# Altium PCB PCB.PcbDoc (part 1 of 2)
Units mil, origin at the board's own origin, x right, y up, seen from the top; angles counter-clockwise.
Board outline 1968.5 x 1220.47 mil, 2 copper layers (Top Layer, Bottom Layer); 78 components, 60 nets, 294 pads, 70 vias.
Unrouted connection lines stored in the file: 2.
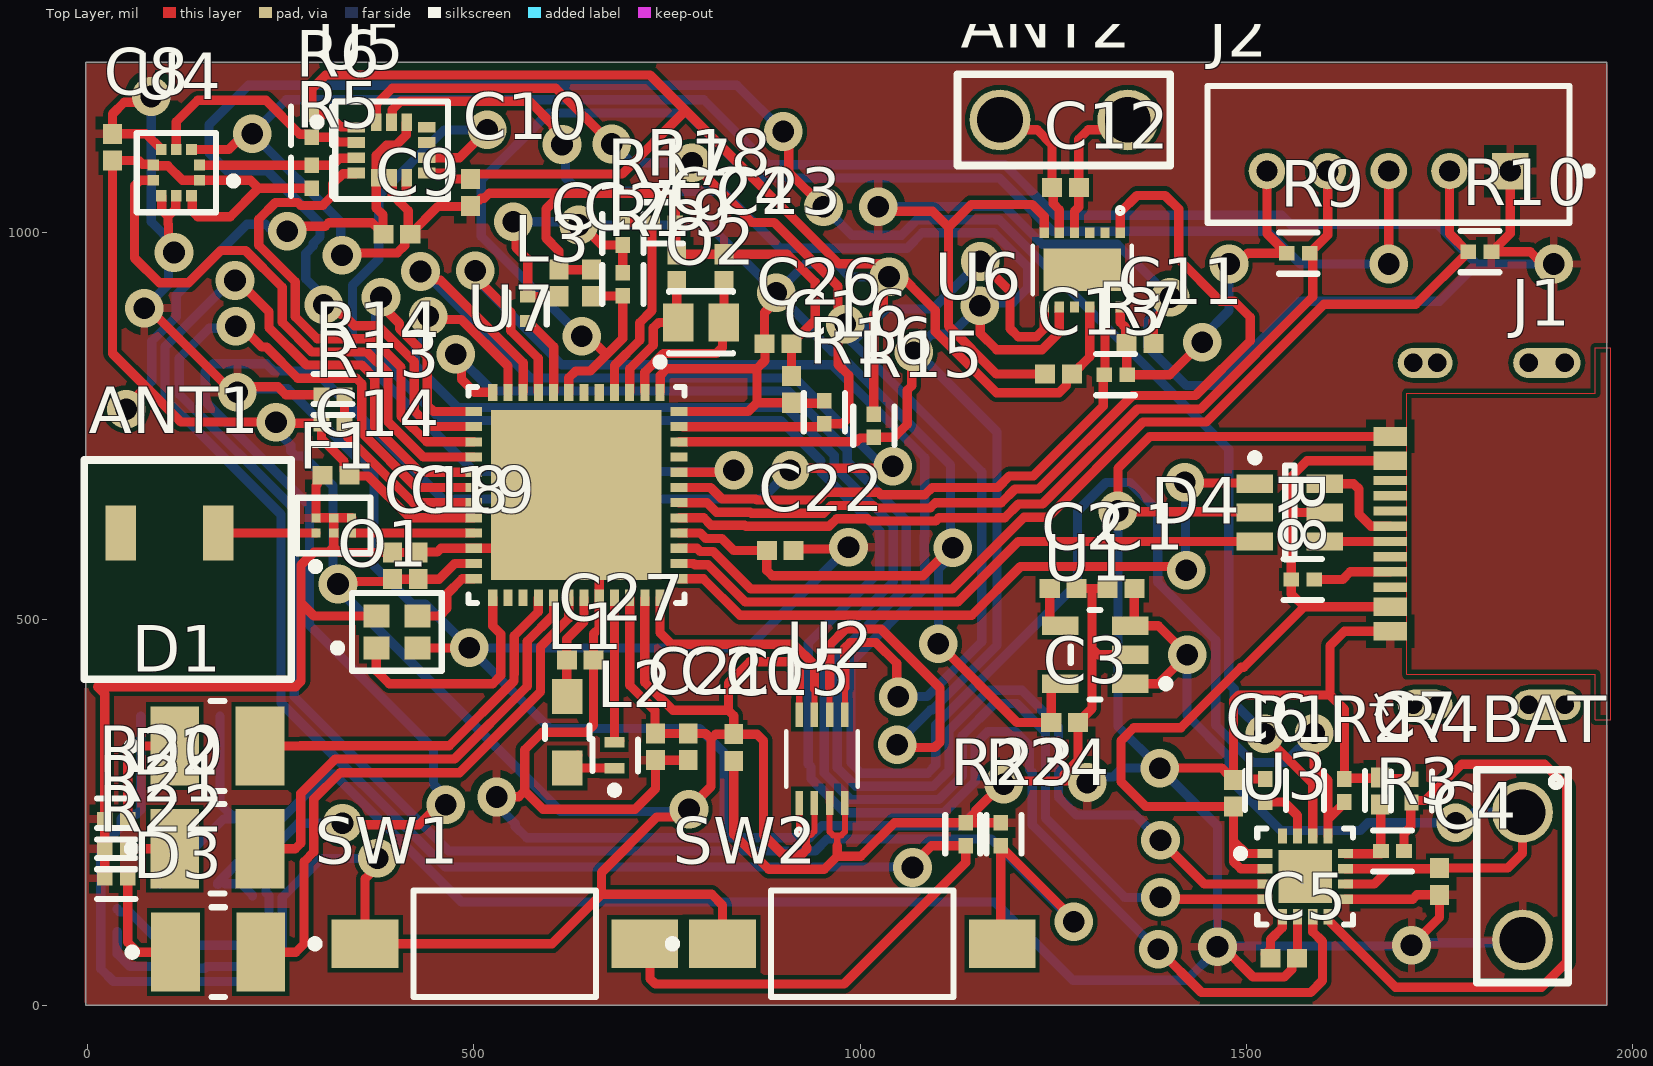
[diagram p0: Top Layer view]
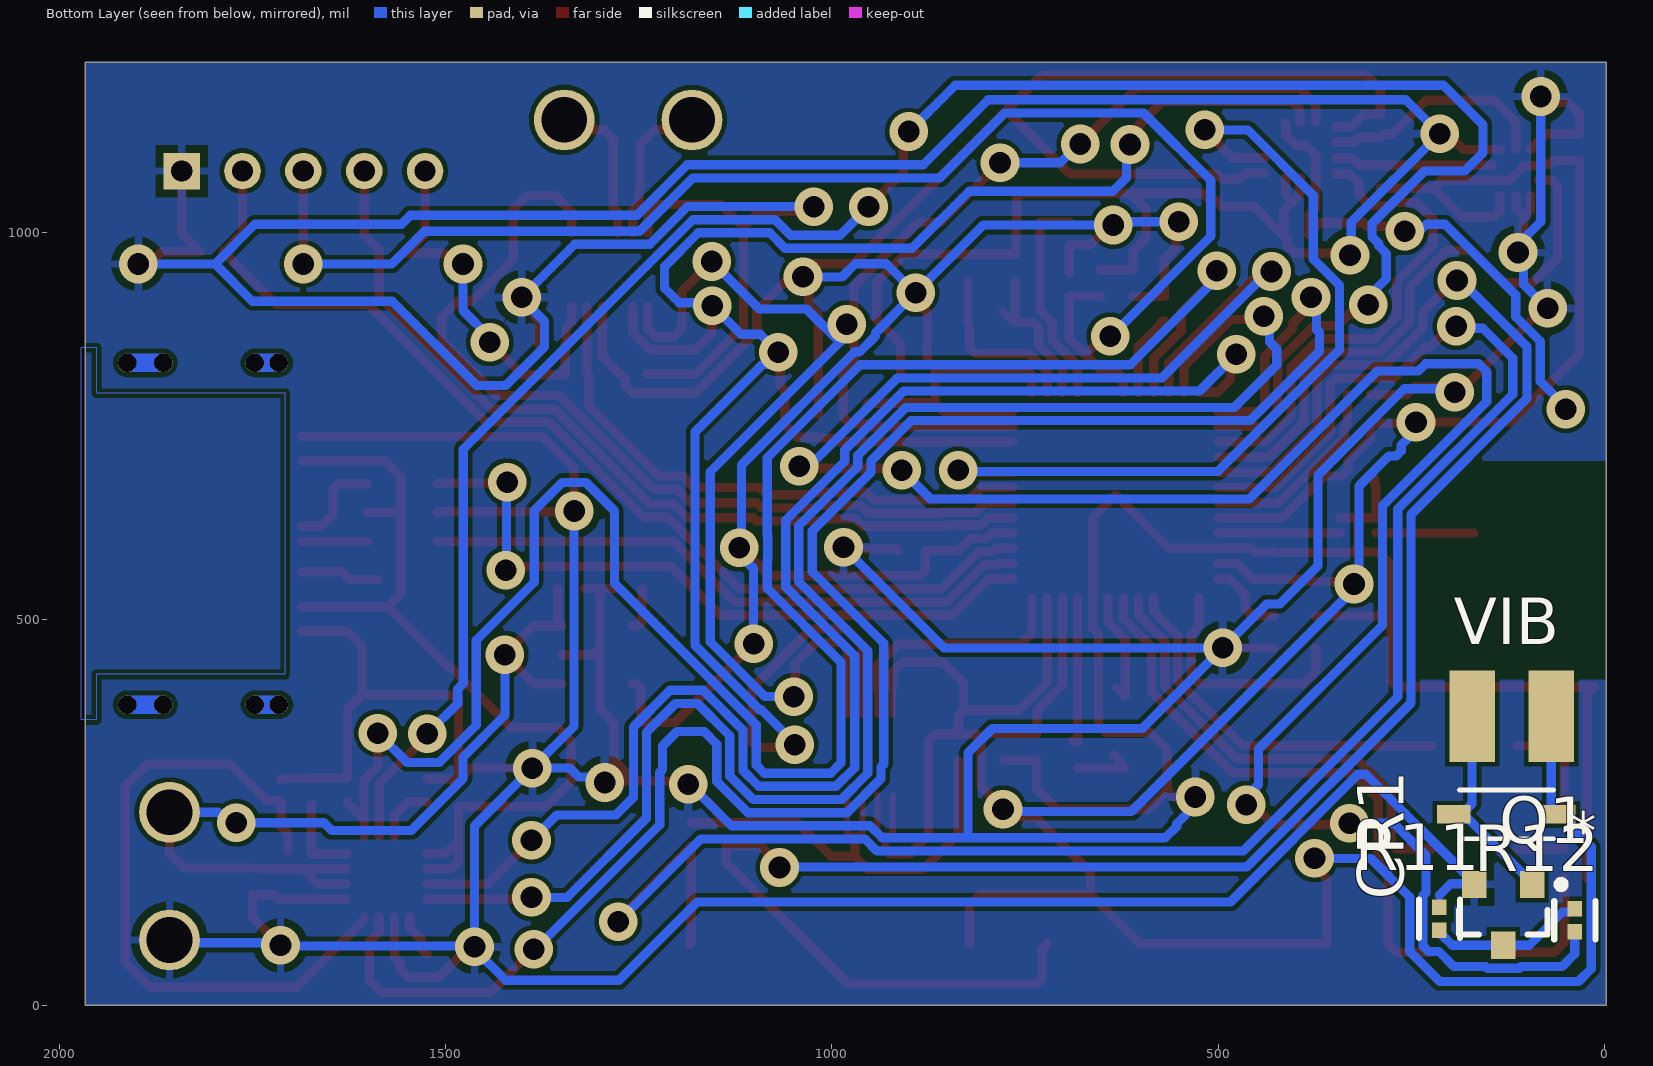
[diagram p1: Bottom Layer view, seen from below]
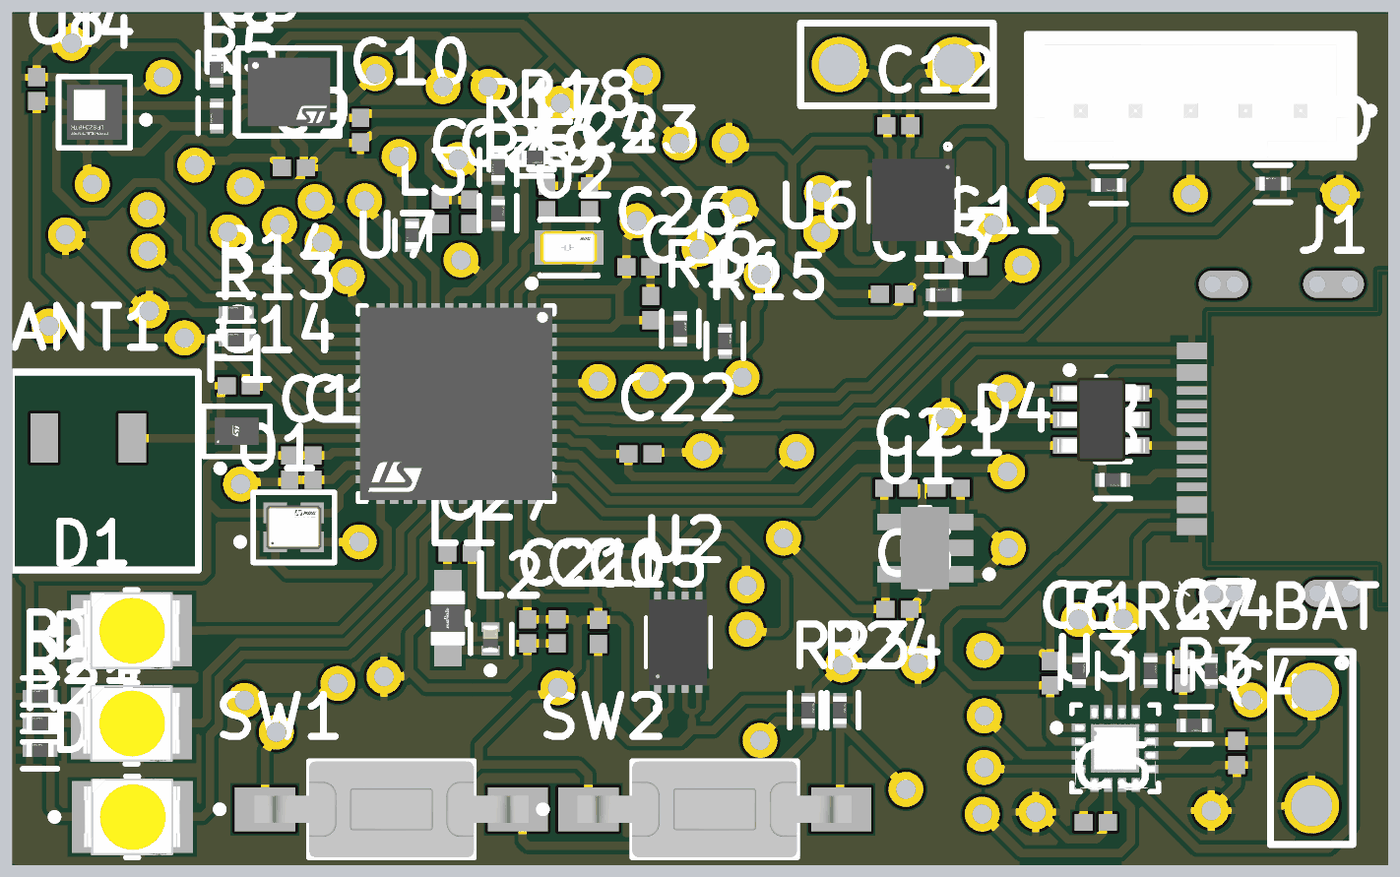
[diagram p3: 3D render of the assembled board from above, using the file's embedded part models]
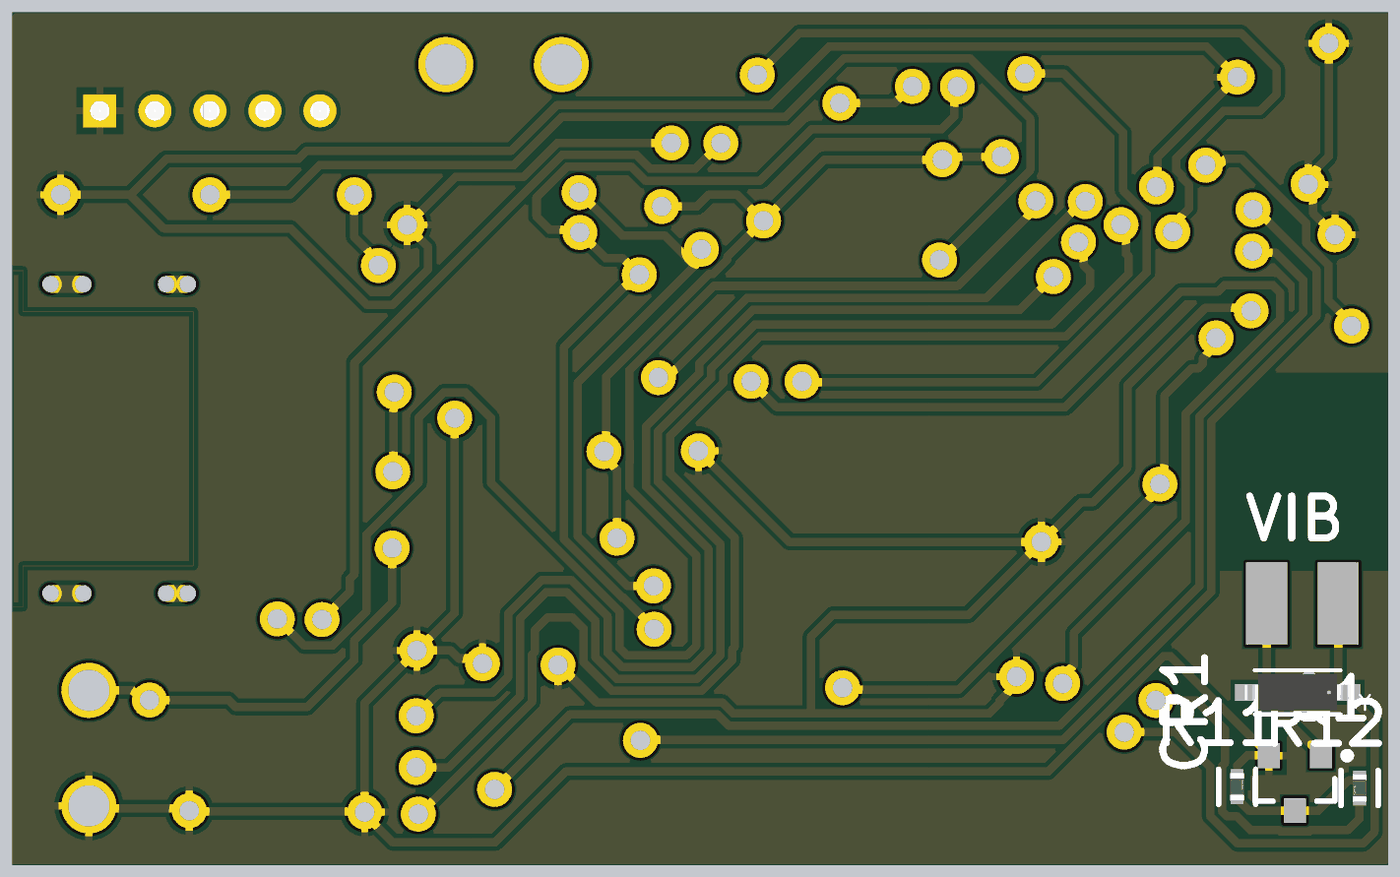
[diagram p4: 3D render of the assembled board from below, using the file's embedded part models]

## Layer stack, top to bottom
Top Solder: solder mask 0.4, Solder Resist, Dk 3.5
Top Layer: signal copper 1.4
Dielectric 1: dielectric 12.6, FR-4, Dk 4.8
Bottom Layer: signal copper 1.4
Bottom Solder: solder mask 0.4, Solder Resist, Dk 3.5

## Board outline
-1.97,0 -1.97,1220.47 1966.54,1220.47 1966.54,0

## Design rules (kind name [scope] priority, off if disabled: settings)
Clearance [All] p1: gap=6 ignorepadtopadclearanceinfootprint=FALSE except(0: Arc-Hole Track-Hole SMDPad-Hole THPad-Hole Via-Hole Fill-Hole Poly-Hole Region-Hole Text-Hole; 5: Arc-Arc Arc-Track Track-Track)
PolygonConnect [All] p1: connectstyle=Relief reliefconductorwidth=10 reliefentries=4 polygonreliefangle="90 Angle" airgapwidth=10
RoomDefinition U_VIBRO [InComponentClass('U_VIBRO')] p1: confinementstyle=ConfineIn formatcopy=TRUE lockcomponents=FALSE outline -32.48,442.07 -32.48,1.97 304.13,1.97 304.13,442.07
RoomDefinition U_LSM6DSRXTR [InComponentClass('U_LSM6DSRXTR')] p2: confinementstyle=ConfineIn formatcopy=TRUE lockcomponents=FALSE outline 247.05,967.52 529.53,967.52 529.53,1258.86 247.05,1258.86
RoomDefinition U_LPS22HBTR [InComponentClass('U_LPS22HBTR')] p3: confinementstyle=ConfineIn formatcopy=TRUE lockcomponents=FALSE outline 199.8,1255.91 5.91,1255.91 5.91,990.16 199.8,990.16
RoomDefinition U_LD3985M33R [InComponentClass('U_LD3985M33R')] p4: confinementstyle=ConfineIn formatcopy=TRUE lockcomponents=FALSE outline 1223.43,341.54 1467.52,341.54 1467.52,568.9 1223.43,568.9
RoomDefinition U_SWD [InComponentClass('U_SWD')] p5: confinementstyle=ConfineIn formatcopy=TRUE lockcomponents=FALSE outline 1964.57,1221.46 1410.43,1221.46 1410.43,875 1964.57,875
RoomDefinition U_STM32WB55CGU6 [InComponentClass('U_STM32WB55CGU6')] p6: confinementstyle=ConfineIn formatcopy=TRUE lockcomponents=FALSE outline 1232.28,0 1232.28,1219.49 -3.94,1219.49 -3.94,0
RoomDefinition U_M24512-DFMC6TG [InComponentClass('U_M24512-DFMC6TG')] p7: confinementstyle=ConfineIn formatcopy=TRUE lockcomponents=FALSE outline 1014.79,208.75 1014.79,433.16 885.85,433.16 885.85,208.75
RoomDefinition U_L6924D013TR [InComponentClass('U_L6924D013TR')] p8: confinementstyle=ConfineIn formatcopy=TRUE lockcomponents=FALSE outline 1314.23,0.98 1961.02,0.98 1961.02,339.57 1314.23,339.57
RoomDefinition U_USB [InComponentClass('U_USB')] p9: confinementstyle=ConfineIn formatcopy=TRUE lockcomponents=FALSE outline 1474.41,413.39 1953.74,413.39 1953.74,807.09 1474.41,807.09
RoomDefinition U_ST25DV64K-JFR6D3 [InComponentClass('U_ST25DV64K-JFR6D3')] p10: confinementstyle=ConfineIn formatcopy=TRUE lockcomponents=FALSE outline 1098.43,776.8 1410.83,776.8 1410.83,1221.69 1098.43,1221.69
RoutingVias [All] p1: holewidth=28 width=50 viastyle="Through Hole" minholewidth=28 minwidth=50 maxholewidth=28 maxwidth=50
SolderMaskExpansion [All] p1: expansion=4 istentingtop=FALSE
Width [All] p1: maxlimit=12 minlimit=6 preferedwidth=8 minimp=50.000000 maximp=50.000000 favimp=50.000000
30 further rules are at their usual default settings.

## Classes and differential pairs
component class U_VIBRO: CR1 Q1 R11 R12 VIB
component class U_USB: D4 J1 R8
component class U_SWD: J2 R9 R10
component class U_STM32WB55CGU6: ANT1 C14 C15 C16 C17 C18 C19 C20 C21 C22 C23 C24 C25 C26 C27 D1 D2 D3 F1 L1 L2 L3 O1 O2 R13 R14 R15 R16 R17 R18 R19 R20 R21 R22 R23 R24 SW1 SW2 U7
component class U_ST25DV64K-JFR6D3: ANT2 C11 C12 C13 R7 U6
component class U_M24512-DFMC6TG: U2
component class U_LSM6DSRXTR: C9 C10 R5 R6 U5
component class U_LPS22HBTR: C8 U4
component class U_LD3985M33R: C1 C2 C3 U1
component class U_L6924D013TR: BAT C4 C5 C6 C7 R1 R2 R3 R4 U3

## Components (designator, comment, footprint, x,y, rotation, side; value= is the part's Value field where it differs from the comment)
ANT1 "KH3216-A55" KH3216-A55 267.72,418.31 r90 top
ANT2 "AT" AC 1263.78,1145.9 r180 top
BAT "Battery" Battery 1857.28,167.32 r270 top
C1 "10 uF" CAPC1005X55X25NL05T10 1337.6,539.37 r0 top
C2 "10 nF" CAPC1005X55X25NL05T10 1262.8,539.37 r180 top
C3 "1 uF" CAPC1005X55X25NL05T10 1264.76,366.14 r180 top
C4 "1 uF" CAPC1005X55X25NL05T10 1750,160.43 r90 top
C5 "330 pF" CAPC1005X55X25NL05T10 1548.23,61.02 r0 top
C6 "1 uF" CAPC1005X55X25NL05T10 1483.27,274.61 r90 top
C7 "1 uF" CAPC1005X55X25NL05T10 1673.23,277.56 r270 top
C8 "4.7 uF" CAPC1005X55X25NL05T10 32.48,1110.63 r270 top
C9 "100 nF" CAPC1005X55X25NL05T10 400.59,998.03 r180 top
C10 "100 nF" CAPC1005X55X25NL05T10 496.06,1052.07 r90 top
C11 "470 nF" CAPC1005X55X25NL05T10 1362.2,856.53 r180 top
C12 "0 uF" CAPC1005X55X25NL05T10 1265.75,1058.3 r180 top
C13 "1 uF" CAPC1005X55X25NL05T10 1256.89,817.16 r180 top
C14 "100 nF" CAPC1005X55X25NL05T10 321.85,686.02 r180 top
C15 "100 nF" CAPC1005X55X25NL05T10 836.61,333.66 r90 top
C16 "100 nF" CAPC1005X55X25NL05T10 911.42,797.24 r90 top
C17 "100 nF" CAPC1005X55X25NL05T10 610.24,935.04 r270 top
C18 "100 nF" CAPC1005X55X25NL05T10 394.68,568.9 r90 top
C19 "100 pF" CAPC1005X55X25NL05T10 428.15,568.9 r270 top
C20 "4.7 uF" CAPC1005X55X25NL05T10 777.56,334.65 r90 top
C21 "100 nF" CAPC1005X55X25NL05T10 735.24,334.65 r270 top
C22 "100 nF" CAPC1005X55X25NL05T10 896.65,588.58 r180 top
C23 "4.3 pF" CAPC1005X55X25NL05T10 823.82,954.72 r90 top
C24 "4.3 pF" CAPC1005X55X25NL05T10 762.8,954.72 r270 top
C25 "100 nF" CAPC1005X55X25NL05T10 652.56,935.04 r270 top
C26 "100 nF" CAPC1005X55X25NL05T10 893.7,856.3 r180 top
C27 "4.7 uF" CAPC1005X55X25NL05T10 637.8,446.85 r0 top
CR1 "BAT43W-7-F" SOD123_DIO 127.25,247.19 r0 bottom
D1 "VLMH3100-GS08" FP-6_541-5067_01-4-MFG 168.31,335.63 r0 top
D2 "VLMH3100-GS08" FP-6_541-5067_01-4-MFG 168.31,202.76 r0 top
D3 "VLMH3100-GS08" FP-6_541-5067_01-4-MFG 169.29,68.9 r0 top
D4 "USBLC6-2SC6" STM-SOT23-6L_V 1556.1,637.8 r0 top
F1 "MLPF-WB55-01E3" FP-MLPF-WB55-01E3-MFG 318.9,621.06 r90 top
J1 "USB4510-03-1-A" USB4510-03-1-A_GCT 1843.5,610.24 r90 top
J2 "B5B-PH-K-S(LF)(SN)" FP-B5B-PH-K-S_LF_SN-MFG 1684.06,1101.38 r180 top
L1 "10uh" FP-LQM21FN_70-MFG 621.06,353.35 r90 top
L2 "10nh" FP-LQG15WH_02-MFG 682.09,323.82 r90 top
L3 "FBH1005-601Y" FP-BLM15-0_05-MFG 569.88,901.57 r270 top
O1 "NX2016SA-32MHZ" FP-NX2016SA-MFG 400.59,483.27 r0 top
O2 "NX2012SA-32.768K" FP-NX2012SA-MFG 794.29,883.86 r180 top
Q1 "DMG3420U-7" DIOD-SOT23-3_B_V 131.19,117.13 r270 bottom
R1 "130 Kohm" FP-RC1005-IPC_C 1524.47,278.15 r90 top
R2 "3.3 Kohm" FP-RC1005-IPC_C 1626.83,278.15 r90 top
R3 "1 Kohm" FP-RC1005-IPC_C 1688.98,199.8 r0 top
R4 "470 ohm" FP-RC1005-IPC_C 1713.58,277.56 r90 top
R5 "10 Kohm" FP-RC1005-IPC_C 290.35,1072.34 r270 top
R6 "10 Kohm" FP-RC1005-IPC_C 290.35,1138.29 r90 top
R7 "4.7 Kohm" FP-RC1005-IPC_C 1330.71,816.17 r180 top
R8 "5.3 Kohm" FP-RC1005-IPC_C 1572.83,551.18 r0 top
R9 "10 Kohm" FP-RC1005-IPC_C 1566.93,973.43 r0 top
R10 "10 Kohm" FP-RC1005-IPC_C 1802.17,975.39 r180 top
R11 "100 Kohm" FP-RC1005-IPC_C 213.87,112.06 r90 bottom
R12 "100 ohm" FP-RC1005-IPC_C 38.67,110.24 r270 bottom
R13 "0 ohm" FP-RC1005-IPC_C 317.91,751.97 r180 top
R14 "0 ohm" FP-RC1005-IPC_C 317.91,790.35 r180 top
R15 "? ohm" FP-RC1005-IPC_C 1017.72,750 r90 top
R16 "? ohm" FP-RC1005-IPC_C 953.74,767.72 r90 top
R17 "0 ohm" FP-RC1005-IPC_C 692.91,999.02 r270 top
R18 "0 ohm" FP-RC1005-IPC_C 746.06,1012.8 r0 top
R19 "100 Kohm" FP-RC1005-IPC_C 692.91,933.07 r90 top
R20 "680 ohm" FP-RC1005-IPC_C 37.4,241.14 r180 top
R21 "680 ohm" FP-RC1005-IPC_C 37.4,202.76 r180 top
R22 "680 ohm" FP-RC1005-IPC_C 37.4,164.37 r180 top
R23 "10 Kohm" FP-RC1005-IPC_C 1136.81,221.6 r90 top
R24 "10 Kohm" FP-RC1005-IPC_C 1182.09,221.6 r90 top
SW1 "FSMSM" TECO-FSMSM-2_V 540.35,79.72 r0 top
SW2 "FSMSM" TECO-FSMSM-2_V 1002.95,79.72 r0 top
U1 "LD3985M33R" FP-SOT23-5L-7049676-MFG 1304.13,453.74 r180 top
U2 "M24512-DFMC6TG" UFDFPN8_STM 950.81,318.93 r90 top
U3 "L6924D013TR" FP-VFQFPN16-7185330-MFG 1576.04,166.93 r0 top
U4 "LPS22HBTR" FP-HLGA-10L-8479831-0 115.16,1077.66 r180 top
U5 "LSM6DSRXTR" FP-LGA-14L-DM00249496-MFG 393.7,1106.79 r0 top
U6 "ST25DV64K-JFR6D3" UFDFPN12_3X3_STM 1287.4,952 r270 top
U7 "STM32WB55CGU6" FP-STM32WB55CGU6-MFG 632.87,660.43 r270 top
VIB "VIBRO" VIBRO 120.36,374.16 r90 bottom

## Footprints (in the part's own frame and the unit in brackets; to place one, negate y for a bottom-side part, rotate by r counter-clockwise, add the part's x,y. Pads: shape width x height; smd on the part's side, far side on the other; paste and mask are expansions set on the pad)
AC [mm]
  round 2 hole 1.5: 1(-2.1,0) 2(2.1,0)
  silkscreen extent -3.5,-1.5 3.5,1.5
Battery [mm]
  round 2 hole 1.5: 1(-2.1,0) 2(2.1,0)
  silkscreen extent -3.5,-1.5 3.5,1.5
CAPC1005X55X25NL05T10 [mm] "Chip Capacitor, 2-Leads, Body 1.00x0.50mm, IPC Medium Density"
  rect 0.66x0.62 smd: 1(-0.44,0) 2(0.44,0)
  body extent -0.53,-0.28 0.53,0.27, height 0.55
DIOD-SOT23-3_B_V [mm] "SOT23, 3-Leads, Body 2.9x1.3mm, Pitch 0.95mm"
  rect 0.9x0.8 smd: 1(-1,0.95) 2(-1,-0.95) 3(1,0)
  silkscreen extent -1.12,-1.45 0.65,2.02, body extent -0.65,-1.45 0.65,1.45, height 1.17
FP-6_541-5067_01-4-MFG [mm]
  rect 1.6x2.6 smd paste+0 mask+0: 1(-1.4,0) 2(1.4,0)
  silkscreen extent -2.95,-1.48 0.23,1.47, body extent -2.3,-1.58 2.3,1.57, height 0.25
FP-B5B-PH-K-S_LF_SN-MFG [mm]
  rect 1.2x1.2 hole 0.7 paste-1000 mask+0: 1(-4,0.55)
  round 1.2 hole 0.7 paste-1000 mask+0: 2(-2,0.55) 3(0,0.55) 4(2,0.55) 5(4,0.55)
  silkscreen extent -6.68,-2.25 5.95,2.25, body extent -6.05,-2.35 6.05,2.35, height 0.25
FP-BLM15-0_05-MFG [mm]
  rect 0.4x0.5 smd paste+0 mask+0: 1(-0.4,0) 2(0.4,0)
  silkscreen extent -0.53,-0.63 0.52,0.63, body extent -0.7,-0.38 0.7,0.38, height 0.25
FP-HLGA-10L-8479831-0 [mm]
  rect 0.375x0.35 smd paste+0 mask+0: 1(-0.763,0.25) 2(-0.763,-0.25) 6(0.763,-0.25) 7(0.763,0.25)
  rect 0.35x0.375 smd paste+0 mask+0: 3(-0.5,-0.763) 4(0,-0.763) 5(0.5,-0.763) 8(0.5,0.763) 9(0,0.763) 10(-0.5,0.763)
  silkscreen extent -2,-1.3 1.3,1.3, body extent -1.55,-1.55 1.55,1.55, height 0.25
FP-LGA-14L-DM00249496-MFG [mm]
  rect 0.575x0.35 smd paste-1000 mask+0: 1(-1.162,0.75) 2(-1.162,0.25) 3(-1.162,-0.25) 4(-1.162,-0.75) 8(1.162,-0.75) 9(1.162,-0.25) 10(1.162,0.25) 11(1.162,0.75)
  rect 0.35x0.575 smd paste-1000 mask+0: 5(-0.5,-0.913) 6(0,-0.913) 7(0.5,-0.913) 12(0.5,0.913) 13(0,0.913) 14(-0.5,0.913)
  silkscreen extent -2.57,-1.6 1.85,1.6, body extent -2.05,-1.8 2.05,1.8, height 0.25
FP-LQG15WH_02-MFG [mm]
  rect 0.35x0.65 smd paste+0 mask+0: 1(-0.425,0) 2(0.425,0)
  silkscreen extent -1.27,-0.78 0.53,0.72, body extent -0.7,-0.43 0.7,0.43, height 0.25
FP-LQM21FN_70-MFG [mm]
  rect 1.15x1 smd paste+0 mask+0: 1(-1.175,0) 2(1.175,0)
  silkscreen extent -0.23,-0.72 0.23,0.72, body extent -1.85,-0.82 1.85,0.82, height 0.25
FP-MLPF-WB55-01E3-MFG [mm]
  rect 0.3x0.3 smd paste-1000 mask-1000: A1(-0.25,0.587) A2(-0.25,0) A3(-0.25,-0.587) B1(0.25,0.587) B2(0.25,0) B3(0.25,-0.587)
  silkscreen extent -1.47,-1.21 0.91,1.21, body extent -1.01,-1.31 1.01,1.31, height 0.25
FP-NX2012SA-MFG [mm]
  rect 1x1.25 smd paste+0 mask+0: 1(-0.75,0) 2(0.75,0)
  silkscreen extent -1.05,-1.02 1.05,1.02, body extent -1.35,-0.72 1.35,0.72, height 0.25
FP-NX2016SA-MFG [mm]
  rect 0.85x0.75 smd paste+0 mask+0: 1(-0.675,-0.525) 2(0.675,-0.525) 3(0.675,0.525) 4(-0.675,0.525)
  silkscreen extent -2.07,-1.28 1.48,1.28, body extent -1.2,-1 1.2,1, height 0.25
FP-RC1005-IPC_C [mil]
  rect 20.29x18.6 smd paste+0 mask+0: 1(-14.9,0) 2(14.9,0)
  silkscreen extent -25,-27 25,27, body extent -29,-15 29,15, height 10
FP-SOT23-5L-7049676-MFG [mm]
  rect 1.2x0.6 smd paste+0 mask+0: 1(-1.15,0.95) 2(-1.15,0) 3(-1.15,-0.95) 4(1.15,-0.95) 5(1.15,0.95)
  silkscreen extent -2.45,-1.48 0.8,1.47, body extent -1.85,-1.58 1.85,1.57, height 0.25
FP-STM32WB55CGU6-MFG [mm]
  rect 0.55x0.3 smd paste+0 mask+0: 1(-3.375,2.75) 2(-3.375,2.25) 3(-3.375,1.75) 4(-3.375,1.25) 5(-3.375,0.75) 6(-3.375,0.25) 7(-3.375,-0.25) 8(-3.375,-0.75) 9(-3.375,-1.25) 10(-3.375,-1.75) 11(-3.375,-2.25) 12(-3.375,-2.75) 25(3.375,-2.75) 26(3.375,-2.25) 27(3.375,-1.75) 28(3.375,-1.25) 29(3.375,-0.75) 30(3.375,-0.25) 31(3.375,0.25) 32(3.375,0.75) 33(3.375,1.25) 34(3.375,1.75) 35(3.375,2.25) 36(3.375,2.75)
  rect 0.3x0.55 smd paste+0 mask+0: 13(-2.75,-3.375) 14(-2.25,-3.375) 15(-1.75,-3.375) 16(-1.25,-3.375) 17(-0.75,-3.375) 18(-0.25,-3.375) 19(0.25,-3.375) 20(0.75,-3.375) 21(1.25,-3.375) 22(1.75,-3.375) 23(2.25,-3.375) 24(2.75,-3.375) 37(2.75,3.375) 38(2.25,3.375) 39(1.75,3.375) 40(1.25,3.375) 41(0.75,3.375) 42(0.25,3.375) 43(-0.25,3.375) 44(-0.75,3.375) 45(-1.25,3.375) 46(-1.75,3.375) 47(-2.25,3.375) 48(-2.75,3.375)
  rect 5.6x5.6 smd paste+0 mask+0: 49(0,0)
  silkscreen extent -4.5,-3.55 3.55,3.55, body extent -3.75,-3.75 3.75,3.75, height 0.25
FP-VFQFPN16-7185330-MFG [mm]
  rect 0.5x0.3 smd paste+0 mask+0: 1(-1.325,0.75) 2(-1.325,0.25) 3(-1.325,-0.25) 4(-1.325,-0.75) 9(1.325,-0.75) 10(1.325,-0.25) 11(1.325,0.25) 12(1.325,0.75)
  rect 0.3x0.5 smd paste+0 mask+0: 5(-0.75,-1.325) 6(-0.25,-1.325) 7(0.25,-1.325) 8(0.75,-1.325) 13(0.75,1.325) 14(0.25,1.325) 15(-0.25,1.325) 16(-0.75,1.325)
  rect 1.75x1.75 smd paste+0 mask+0: 17(0,0)
  silkscreen extent -2.25,-1.58 1.58,1.58, body extent -1.68,-1.68 1.68,1.68, height 0.25
KH3216-A55 [mm]
  rect 1.8x1 smd: 1(4.9,2.5) 2(4.9,5.7)
  silkscreen extent 0.1,0.1 7.3,6.9
SOD123_DIO [mm]
  rect 1.111x0.601 smd paste+0 mask+0: 1(-1.725,0) 2(1.725,0)
  silkscreen extent -1.55,-0.8 1.55,0.8, body extent -1.92,-0.67 1.92,0.67, height 0.81
STM-SOT23-6L_V [mm] "SOT23, 6-Leads, Body 3.05x1.75mm, Pitch 0.95mm"
  rect 1.2x0.6 smd: 1(-1.15,0.95) 2(-1.15,0) 3(-1.15,-0.95) 4(1.15,-0.95) 5(1.15,0) 6(1.15,0.95)
  silkscreen extent -1.27,-1.55 0.15,1.92, body extent -1.6,-1.53 1.6,1.53, height 1.45
TECO-FSMSM-2_V [mm] "SMD, 2-Leads, Body 6x3.5mm, Pitch 9.19mm"
  rect 2.2x1.6 smd: 1(-4.595,0)
  rect 2.18x1.6 smd: 2(4.595,0)
  silkscreen extent -6.37,-1.75 3,1.75, body extent -4.98,-1.75 4.98,1.75, height 4.4
UFDFPN8_STM [mil]
  rect 31.51x9.83 smd paste+0 mask+0: 1(-57.06,29.55) 2(-57.06,9.85) 3(-57.06,-9.85) 4(-57.06,-29.55) 5(57.06,-29.55) 6(57.06,-9.85) 7(57.06,9.85) 8(57.06,29.55)
  silkscreen extent -99,-46 36,46, body extent -61,-41 61,41, height 24
UFDFPN12_3X3_STM [mil]
  rect 14x12 smd paste+0 mask+0: 1(-48,49.21) 2(-48,29.53) 3(-48,9.84) 4(-48,-9.84) 5(-48,-29.53) 6(-48,-49.21) 7(48,-49.21) 8(48,-29.53) 9(48,-9.84) 10(48,9.84) 11(48,29.53) 12(48,49.21)
  rect 55x100 smd paste+0 mask+0: 13(0,0)
  silkscreen extent -81,-64 31,64, body extent -59,-59 59,59, height 24
USB4510-03-1-A_GCT [mil]
  oval 39x71 smd: 13(-221.25,112.25) 14(221.25,112.25)
  oval 39x87 smd: 15(-221.25,-45.2) 16(221.25,-45.2)
  rect 24x43 smd paste+0 mask+0: A1-B12(-126,157.5) A4-B9(-94.5,157.5) B1-A12(126,157.5) B4-A9(94.5,157.5)
  rect 12x43 smd paste+0 mask+0: A5(-49.2,157.5) A6(-9.8,157.5) A7(9.9,157.5) A8(49.3,157.5) B5(69,157.5) B6(29.6,157.5) B7(-29.5,157.5) B8(-69,157.5)
  round 24 hole 24 unplated: S_1_H1(-221.25,127.75) S_1_H2(-221.25,96.75) S_2_H1(221.25,127.75) S_2_H2(221.25,96.75) S_3_H1(-221.25,-21.7) S_3_H2(-221.25,-68.7) S_4_H1(221.25,-21.7) S_4_H2(221.25,-68.7)
  Multi-Layer lines w1: -176,-128 176,-128 ; -182,136 -182,-108.2 -240.75,-108.2 -240.75,-128 240.75,-128 240.75,-108.2 182,-108.2 182,136 -182,136
  Multi-Layer lines w24: -221.25,127.75 -221.25,96.75 ; 221.25,127.75 221.25,96.75 ; -221.25,-21.7 -221.25,-68.7 ; 221.25,-21.7 221.25,-68.7
  body extent 0,0 10,10, height 10
VIBRO [mm]
  rect 3x1.5 smd: 1(0,1.3) 2(0,-1.3)

## Part data
C1 C2 C3 C4 C5 C6 C7 C8 C9 C10 C11 C12 C13 C14 C15 C16 C17 C18 C19 C20 C21 C22 C23 C24 C25 C26 C27: library part CMP-2008-04515-1, Manufacturer=Murata, Part Number=GRM155F50J684ZE01D
CR1: Mfr_Name="Diodes Inc", Copyright="Copyright (C) 2023 Ultra Librarian. All rights reserved.", Manufacturer_Part_Number=BAT43W-7-F, RefDes=RefDes, Type=DEV
D1 D2 D3: library part CMP-02520-000006-1, "LED AMBER CLEAR 2PLCC SMD", Ambient Temperature Range High=+100°C, Ambient Temperature Range Low=-40°C, Colour=Amber, Forward Current=20mA, Forward Voltage=2V, Manufacturer=Vishay, Package=6.541-5067.01-4, Power Dissipation=100mW, Reverse Voltage=15V, Temperature="-40°C to +100°C", Automotive=Yes, Automotive Grade="Grade 2", Category=Diode, ComponentLink2Description=Datasheet, ComponentLink2URL=http://www.vishay.com/docs/84789/vlmg310.pdf, Device Class L1=Optoelectronics, Device Class L2=LEDs, Device Class L3=unset, Digikey Description="LED AMBER CLEAR 2PLCC SMD", Height=1.85mm, Lead Free=Yes, Led Orientation="Top View", Luminous Intensity=10mcd, Manufacturer Part Number=VLMH3100-GS08, Max Junction Temp=+100°C, Mouser Description="LED Uni-Color Red 635nm Automotive 2-Pin PLCC T/R", Octopart=https://octopart.com/vlmh3100-gs08-vishay-10477172, Peak Emmision Wavelength=635nm, RoHS=TRUE, Temperature Range High=+100°C, Temperature Range Low=-40°C, Viewing Angle=120°, Wavelength=619nm
D4: library part CMP-2000-05378-1, "Very low capacitance ESD protection, 3.5 pF, -40 to 125 degC, 6-Pin SOT23, RoHS, Tape and Reel", Capacitance Value=3.5pF, Clamping Voltage=17V, Leakage Current=0.15uA, Manufacturer=STMicroelectronics, Operating Temp Range=-40Cto125C, Operating Temperature Classification=Automotive, Operating Temperature Max Deg. C=125C, Operating Temperature Min Deg. C=-40C, Package / Case=SOT-23, Package Description="6-Pin Small Outline Transistor, Body 2.925 x 1.625 mm, Pitch 0.95 mm", Package Reference=SOT23-6L, Peak Pulse Current=5A, Reverse Breakdown Voltage=6V, Reverse Stand-off Voltage=5V, Test Current (It)=1mA, Clamping Voltage (Max)=17V, Configuration=Dual, Datasheet URL=http://www.st.com/st-web-ui/static/active/en/resource/technical/document/datasheet/CD00050750.pdf, Datasheet Version="Rev. 5, 10/2011", Direction Type=Uni-Directional, Leakage Current (Max)=0.15uA, Manufacturer URL=http://www.st.com/, Mounting=SurfaceMount, Mounting Style=SurfaceMount, Number of Elements=1, Packaging=TapeandReel, Pin Count=6, Polarity=Uni-Directional, Product Depth (mm)=1.75mm, Product Height (mm)=1.3mm, Product Length (mm)=3.05mm, Rad Hardened=No, Suppressor Type=DiodeArrays, Working Voltage=5V, Working Voltage (Max)=5V
F1: library part CMP-12074-000002-1, "RF FILTER LOW PASS 2.45GHZ 6SMD"
J1: Mfr_Name="Global Connector Technology", Copyright="Copyright (C) 2023 Ultra Librarian. All rights reserved.", Manufacturer_Part_Number=USB4510-03-1-A, RefDes=RefDes, Type=Type
J2: library part CMP-2000-05908-2, "CONN HEADER VERT 5POS 2MM", Color=Natural, Contact Resistance=20mR, Current Rating=2A, Flammability Rating="UL94 V-0", Housing Color=White, Insulation Resistance=1MR, Max Operating Temperature=85°C, Max Voltage Rating (AC)=100V, Min Operating Temperature=-25°C, Connector Type=Header, Contact Finish - Mating=TIN, Contact Material=Brass, Contact Mating Length=0.13inch, Contact Plating=Tin, Contact Shape=Square, Contact Type="Male Pin", Depth=4.5mm, Fastening Type=Detent, Gender=Male, Height=9.4mm, Housing Material=Polyamide, Insulation Color=Natural, Insulation Material=Nylon, Lead Free="Lead Free", Lead Pitch=2mm, Length=11.9mm, Mated Stacking Heights=8mm, Material=Polyamide, Max Current Rating=2A, Mount="Through Hole", Number of Contacts=5, Number of Pins=5, Number of Poles=5, Number of Positions=5, Number of Rows=1, Orientation=Straight, Packaging=Bulk, Pitch=2mm, REACH SVHC="No SVHC", Series=PH, Termination=Solder, Voltage Rating=100V, Voltage Rating (AC)=100V, Width=4.5mm, Working Voltage=100V
L1: library part CMP-2000-06587-2, "FIXED IND 10UH 100MA 780MOHM SMD", Case Code (Imperial)=0805, Case Code (Metric)=2012, Current Rating=100mA, DC Resistance (DCR)=780mR, Inductance=10uH, Max Operating Temperature=125°C, Min Operating Temperature=-55°C, Package Quantity=3000, Self Resonant Frequency=15MHz, Test Frequency=1MHz, Tolerance=20%, Case/Package=0805, Core Material=Ferrite, DC Current=100mA, Depth=1.45mm, Height=1.45mm, Height - Seated (Max)=0.057inch, Lead Free="Lead Free", Length=2.2mm, Max DC Current=100mA, Military Standard=Not, Mount="Surface Mount", Packaging="Tape and Reel", Radiation Hardening=No, Rated Current-Max=100mA, RoHS Compliant=Yes, Saturation Current=100mA, Series=LQM21F_70, Shielding=Shielded, Termination=SMD/SMT, Width=0.049inch
L2: library part CMP-06042-005237-1, "Multilayer type Inductor for Automotive 10nH ±5% 0.19Ω 500mA 0402", Case Code (Imperial)=0402, Case Code (Metric)=1005, Current Rating=500mA, DC Resistance (DCR)=190mR, Inductance=10nH, Max Operating Temperature=125°C, Min Operating Temperature=-55°C, Ratings=AEC-Q200, Self Resonant Frequency=3.3GHz, Test Frequency=100MHz, Tolerance=5%, Case/Package=0402, Core Material=Air, Mount="Surface Mount", Packaging="Cut Tape", Shielding=Unshielded
L3: library part CMP-0686-00187-4, "Chip Ferrite Bead, 0402, 600Ω @ 100MHz, 0.52Ω, 25%, 300mA", Case Code (Imperial)=0402, Case Code (Metric)=1005, Current Rating=300mA, DC Resistance (DCR)=520mR, DC Resistance-Max=600mR, Frequency=100MHz, Max Operating Temperature=125°C, Min Operating Temperature=-55°C, Package Quantity=10000, Tolerance=25%, Case/Package=0402, Core Material=Ferrite, DC Current=300mA, Depth=0.55mm, Height=0.5mm, Impedance=600R, Lead Free="Lead Free", Length=1mm, Material=Steel, Max Current Rating=300mA, Max DC Current=300mA, Military Standard=Not, Number of Circuits=1, Number of Lines=1, Number of Pins=2, Packaging="Tape and Reel", Radiation Hardening=No, REACH SVHC="No SVHC", RoHS Compliant=Yes, Series=BLM15AG_SN, Shielding=Unshielded, Termination=SMD/SMT, Test Frequency=100MHz, Width=0.5mm
O1: library part CMP-200220-000017-1, "CRYSTAL 32.0000MHZ 8PF SMD", Case/Package=SMD/SMT, ESR (Equivalent Series Resistance)=60R, Frequency=32MHz, Load Capacitance=8pF, Max Operating Temperature=125°C, Min Operating Temperature=-40°C, Ratings=AEC-Q200, Mount="Surface Mount", Packaging="Tape and Reel"
O2: library part CMP-200220-000019-1, "CRYSTAL 32.7680KHZ 12.5PF SMD", Case/Package=SMD/SMT, ESR (Equivalent Series Resistance)=80kR, Frequency=32.768kHz, Frequency Tolerance=20ppm, Load Capacitance=12.5pF, Max Operating Temperature=85°C, Min Operating Temperature=-40°C, Height=0.024inch, Length=0.081inch, Mount="Surface Mount", Packaging="Cut Tape", RoHS Compliant=Yes, Series=NX2012SA, Width=0.047inch
Q1: library part CMP-2000-06172-1, "N-Channel Enhancement Mode MOSFET, 20 V, -55 to 150 degC, 3-Pin SOT23, RoHS, Tape and Reel", Drain-Source On Resistance-Max=29mO, Drain-to-Source Voltage [Vdss]=20V, Manufacturer="Diodes Inc", Package Description="3-Pin Small Outline Transistor, Body 2.9 x 1.3 mm, Pitch 0.96 mm", Package Reference=SOT23-3, Rated Power Dissipation=740mW, Channel Type=N-Channel, Datasheet URL=http://www.diodes.com/_files/datasheets/ds31867.pdf, Datasheet Version="Rev. 5-2, 09/2013", Manufacturer URL=http://www.diodes.com/, Mounting Technology=SurfaceMount, Qg Gate Charge=5.4nC
R1 R2 R3 R4 R5 R6 R7 R8 R9 R10 R11 R12 R13 R14 R15 R16 R17 R18 R19 R20 R21 R22 R23 R24: library part CMP-13261-000953-1, "Res Thick Film 0402 1.87kΩ 1% 0.063W ±100ppm/°C Molded SMD T/R", Case Code (Imperial)=0402, Case Code (Metric)=1005, Max Operating Temperature=155°C, Max Power Dissipation=63mW, Min Operating Temperature=-55°C, Package Quantity=1, Resistance=1.87kR, Temperature Coefficient=100ppm/°C, Tolerance=1%, Voltage Rating (DC)=50V, Case/Package=0402, Composition="Thick Film", Contact Plating=Tin, Depth=0.5mm, Features="Moisture Resistant", Height=0.016inch, Lead Free="Lead Free", Length=1mm, Military Standard=Not, Number of Terminations=2, Packaging="Tape and Reel", Power Rating=63mW, Radiation Hardening=No, Width=0.02inch
SW1 SW2: library part CMP-2000-07511-1, "FSMSM Push Button Switch, 50 mA, -35 to 85 degC, 2-Pin SMD, RoHS, Bulk", Case\/Package=SMD/SMT, Contact Current Rating=50mA, Contact Resistance=100mOhm, Manufacturer="TE Connectivity", Max Operating Temperature=85degC, Max Voltage Rating (DC)=12V, Min Operating Temperature=-35degC, Operating Force=180gf, Package Description="2-Pin Surface Mount Device, Body 6 x 3.5 mm, Pitch 9.19 mm", Package Quantity=1000, Voltage Rating (DC)=24V, Actuator Length=1.07mm, Actuator Material=Polyamide, Contact Material=Brass, Contact Plating=Silver, Current Rating=50mA, Datasheet URL=http://www.te.com/commerce/DocumentDelivery/DDEController?Action=showdoc&DocId=Customer+Drawing%7F1437566-3%7FC2%7Fpdf%7FEnglish%7FENG_CD_1437566-3_C2_1437566_3_1_c.dwg.pdf%7F1437566-3, Datasheet Version="Rev. C2, 08/2014", Electrical Life=20000Cycles, ELV=Compliant, Illumination Type=Illuminated, Lead Free=LeadFree, Manufacturer URL=http://www.te.com/, Mechanical Life=20000Cycles, Mount=SurfaceMount, Mounting Technology=SurfaceMount, Orientation=Straight, Package Reference=FSMSM, Packaging=LoosePiece, REACH SVHC=Unknown, RoHSCompliant=true, Switch Travel=0.25mm, Termination=GullWing, Throw Configuration=SPST
U1: library part CMP-0244-00328-2, "IC REG LINEAR 3.3V 150MA SOT23-5", Case/Package=SOT-23, Dropout Voltage=60mV, Input Bias Current=85uA, Max Input Voltage=6V, Max Operating Temperature=125°C, Max Output Current=150mA, Min Current Limit=300mA, Min Input Voltage=2.5V, Min Operating Temperature=-40°C, Min Output Voltage=3.3V, Output Voltage Accuracy=2%, Package Quantity=1, Quiescent Current=150uA, Accuracy=2%, Height=1.3mm, Lead Free="Lead Free", Length=3mm, Mount="Surface Mount", Number of Outputs=1, Number of Pins=5, Number of Regulators=1, Output Current=150mA, Output Type=Fixed, Output Voltage=3.3V, Packaging="Tape and Reel", Polarity=Positive, Radiation Hardening=No, Width=1.75mm
U2 U6: Mfr_Name=STMicroelectronics, Copyright="Copyright (C) 2023 Ultra Librarian. All rights reserved.", RefDes=RefDes, Type=DEV
  U2: Manufacturer_Part_Number=M24512-DFMC6TG
  U6: Manufacturer_Part_Number=ST25DV64K-JFR6D3
U3: library part CMP-12147-000005-1, "IC BATT CHRGR ION/POLY 16-VFQFPN", Manufacturer=STMicroelectronics, Max Junction Temp=+125°C, Max Power Dissipation=0.67W, Max Supply Voltage=12V, Min Supply Voltage=2.5V, Nominal Supply Current=1.8mA, Output Current=975mA, Output Voltage=4.2V, Package=VFQFPN16-7185330, Temperature="-40°C to +125°C", Temperature Range Low=-40°C, Automotive=No, Category=IC, ComponentLink2Description=Datasheet, ComponentLink2URL=https://www.st.com/resource/en/datasheet/l6924d.pdf, Device Class L1="Integrated Circuits (ICs)", Device Class L2="Power Management ICs", Device Class L3="Battery Management", Digikey Description="IC BATT CHRGR ION/POLY 16-VFQFPN", Footprint Url=https://www.st.com/resource/en/datasheet/l6738.pdf, Height=1mm, Ipc Land Pattern Name=QFN50P300X300X90-16, Lead Free=Yes, Manufacturer Part Number=L6924D013TR, Mouser Description="Battery Management Battery Charger Sys Li-Ion/Li-Poly", Number Of Cells=1, Number of Outputs=1, Octopart=https://octopart.com/l6924d013tr-stmicroelectronics-421996, RoHS=TRUE, Standoff Height=0.02mm, Temperature Range High=+125°C
U4: library part CMP-12182-000004-1, "MEMS NANO PRESSURE SENSOR: 260-1", Manufacturer=STMicroelectronics, Max Supply Voltage=3.6V, Min Supply Voltage=1.7V, Operating Supply Current=3-12uA, Package=HLGA-10L-8479831, Temperature="-40°C to +85°C", Temperature Range High=+85°C, Temperature Range Low=-40°C, Automotive=No, Category=IC, ComponentLink2Description=Datasheet, ComponentLink2URL=https://www.st.com/resource/en/datasheet/lps22hb.pdf, Device Class L1=Sensors, Device Class L2="Pressure Sensors", Device Class L3=unset, Digikey Description="MEMS NANO PRESSURE SENSOR: 260-1", Footprint Url=https://www.st.com/content/ccc/resource/technical/document/technical_note/73/17/9c/16/dd/96/4a/01/CD00134799.pdf/files/CD00134799.pdf/jcr:content/translations/en.CD00134799.pdf, Height=0.8mm, Lead Free=Yes, Manufacturer Part Number=LPS22HBTR, Octopart=https://octopart.com/lps22hbtr-stmicroelectronics-51851131, Port Style="No Port", RoHS=TRUE, Sensor Output=I2C,SPI
U5: library part CMP-12177-000016-1, "CONSUMER MEMS", RoHS Compliant=Yes
U7: library part CMP-12105-000013-1, "ULTRA-LOW-POWER DUAL CORE ARM CO", Ambient Temperature Range High=+85°C, Ambient Temperature Range Low=-40°C, Frequency=64MHz, Manufacturer=STMicroelectronics, Max Junction Temp=+105°C, Max Supply Voltage=3.6V, Min Supply Voltage=1.71V, Package=UFQFPN48, Temperature="-40°C to +105°C", Automotive=No, Category=IC, ComponentLink2Description=Datasheet, ComponentLink2URL=https://www.st.com/resource/en/datasheet/stm32wb55cg.pdf, Core Architecture="ARM Cortex-M4", Data Bus Width=32bits, Device Class L1="Integrated Circuits (ICs)", Device Class L2="Embedded Processors and Controllers", Device Class L3=Microcontrollers, Digikey Description="ULTRA-LOW-POWER DUAL CORE ARM CO", Height=0.65mm, Interface=I2C,SPI,UART,USART,2-Wire,USB,IrDA,Other, Lead Free=Yes, Manufacturer Part Number=STM32WB55CGU6, Memory Size=1MBytes, Memory Type=FLASH, Number Of A/D Converters=1, Number Of Adc Channels=13, Number Of Cores=1, Number Of I2C Channels=2, Number Of I/Os=30, Number Of Pwm Channels=14, Number Of Spi Channels=1, Number Of Timers/Counters=6, Number Of Uart Channels=2, Number Of Usb Channels=1, Octopart=https://octopart.com/stm32wb55cgu6-stmicroelectronics-98750847, Ram Size=256KBytes, RoHS=TRUE, Standoff Height=0mm, Temperature Range High=+105°C, Temperature Range Low=-40°C

## Via types
v1: diameter 50, hole 28, Top Layer to Bottom Layer, 70 vias

## Nets (pads, with @x,y where several pads share a name; then routed paths per layer and width w, separated by ;. In a path a pad name is that pad's centre, name@x,y a point inside that pad or via, vN(x,y) a via of type N, cw(c..) or ccw(c..) an arc to the next point about the centre after c; other vN are vias at no path point)
+3.3: C3.2 C8.2 C9.2 C10.2 C11.2 C13.1 C14.1 C15.2 C16.1 C17.2 C18.1 C19.2 C20.2 C21.1 C22.2 C26.2 CR1.1 J2.5 L3.1 R5.2 R6.2 R7.1 R9.1 R13.2 R15.2 R16.2 R17.2 R19.2 SW1.1 SW2.1 U1.5 U2.1 U2.2 U2.8 U4.1 U4.6 U4.10 U5.1 U5.5 U5.8 U5.12 U6.10 U6.12 U7.1 U7.20 U7.23 U7.34 U7.35 U7.40 U7.48 VIB.2 | length 10834.3
  Top Layer w8: U2.1@921.24,272.61 921.24,225.16 925.92,220.47 931.09,220.47 931.09,204.74 ; U2.8@921.26,375.98 921.26,411.42 ; 936.25,220.47 940.94,225.16 U2.2@940.94,272.61
  Top Layer w12: v1(50.2,771.65) 50.2,774.61 75.79,800.2 ; U4.10@134.84,1047.64 135.73,1046.75 135.73,1027.7 142.76,1020.67 184.78,1020.67 221.55,1057.44 ; v1@244.09,751.97 245.37,753.24 301.73,753.24 303.15,751.83 303.15,733.27 332.18,704.24 332.18,692.23 338.39,686.02 C14.1@339.17,686.02 340.16,685.04 363.2,685.04 417.34,630.91 U7.20@500,630.91 ; v1(244.09,754.52) 243.69,754.92 121.06,754.92 75.79,800.2 ; v1(258.86,1001.81) 265.32,1008.28 307.86,1008.28 312.38,1012.8 368.5,1012.8 376.28,1005.02 376.28,1004.24 C9.2@382.48,998.03 ; R5.2@290.35,1057.44 221.55,1057.44 ; v1(324.4,545.28) 327.55,548.43 391.54,548.43 C18.1@394.68,551.57 C19.2@428.15,551.57 455.12,551.57 475.39,571.85 U7.23@500,571.85 ; U5.1@347.93,1136.32 347.04,1137.21 327.85,1137.21 311.87,1153.19 R6.2@290.35,1153.19 290.35,1186.02 308.34,1204.01 728.08,1204.01 774.11,1157.97 ; v1(375.56,190.23) 375.56,179.94 359.45,163.84 SW1.1@359.45,79.72 601.38,79.72 665.35,143.7 ; C9.2@383.27,998.03 C9.2@382.48,998.03 ; U5.12@413.39,1142.72 412.59,1141.92 412.59,1126.43 399.47,1113.31 387.14,1113.31 374.02,1100.18 U5.5@374.02,1070.87 374.02,1031.5 382.48,1023.03 C9.2@382.48,998.03 ; U5.8@439.47,1077.26 463.58,1077.26 471.46,1069.39 C10.2@496.06,1069.39 496.06,1069.58 502.27,1075.79 691.93,1075.79 774.11,1157.97 ; v1(551.18,1014.18) 554.62,1010.74 554.62,980.81 569.88,965.55 L3.1@569.88,917.32 570.08,917.52 610.04,917.52 C17.2@610.24,917.72 ; v1(635.83,1009.84) 639.88,1009.84 665.61,984.11 R17.2@692.91,984.11 R19.2@692.91,947.97 ; U7.34@701.77,527.56 701.77,414.37 734.65,381.5 C21.1@734.65,351.97 ; U7.35@721.46,527.56 721.46,418.31 757.87,381.89 829.58,381.89 ; C21.1@735.24,351.97 C20.2@776.57,351.97 ; U7.1@741.14,793.31 741.24,793.4 741.24,815.05 750,823.82 866.14,823.82 ; U7.40@765.75,611.22 793.27,611.22 800.16,604.33 820.87,604.33 836.61,588.58 C22.2@879.33,588.58 879.33,562.95 886.36,555.92 1081.51,555.92 1117.71,592.12 v1(1120.08,592.12) ; U7.48@765.75,768.7 855.31,768.7 866.54,779.92 ; C20.2@777.56,351.97 800.06,351.97 807.09,344.94 ; SW2.1@822.05,79.72 822.05,129.72 808.07,143.7 665.35,143.7 ; v1(891.73,922.24) 891.73,911.96 876.38,896.61 C26.2@876.38,856.3 876.97,855.71 876.97,834.65 866.14,823.82 ; 921.26,411.42 921.26,432.09 908.46,444.88 857.28,444.88 829.58,417.18 829.58,381.89 ; 931.09,204.74 931.09,201.91 925.04,195.87 899.61,195.87 875,220.47 875,342.52 866.54,350.98 C15.2@836.61,350.98 ; R16.2@953.74,778.68 953.12,779.3 912.04,779.3 C16.1@911.42,779.92 866.54,779.92 ; R15.2@1017.72,764.9 1017.72,893.73 1030.13,906.15 1030.13,935.46 v1(1037.4,942.73) ; v1@1034.09,946.05 1037.4,949.36 v1@1037.4,959.65 ; v1(1101.38,467.92) 1203.16,366.14 C3.2@1247.44,366.14 1247.44,410.53 1253.25,416.34 U1.5@1258.86,416.34 ; U6.10@1297.24,904 1297.24,839.4 1275,817.16 C13.1@1274.21,817.16 1273.43,817.16 1267.22,810.95 1267.22,802.64 1257.53,792.95 1176.54,792.95 1097.37,872.12 1097.37,899.68 v1@1037.4,959.65 ; U6.12@1336.61,904 1336.61,884.09 1343.5,877.2 1343.5,857.91 C11.2@1344.88,856.53 1345.25,856.16 1345.25,816.54 R7.1@1345.61,816.17 1400.82,816.17 v1(1442.91,858.27) ; v1(1477.36,959.51) 1487.64,959.51 1501.56,973.43 R9.1@1551.18,973.43 ; J2.5@1526.57,1079.72 1526.57,998.88 1547.88,977.57 1547.88,976.73 R9.1@1551.18,973.43 ; R9.1@1552.03,973.43 R9.1@1551.18,973.43 ; 75.79,800.2 32.48,843.5 C8.2@32.48,1093.31 66.54,1093.31 71.45,1088.39 84.25,1088.39 U4.6@85.14,1087.5 85.93,1086.7 104.24,1086.7 123.13,1067.81 U4.1@145.18,1067.81 211.17,1067.81 221.55,1057.44 ; 665.35,143.7 665.35,172.08 736.99,243.71 771.27,243.71 778.54,250.98 778.54,254.71 807.09,283.25 807.09,344.94 ; 774.11,1157.97 972.44,959.65 v1@1037.4,959.65 ; 807.09,344.94 813.13,350.98 C15.2@836.61,350.98 ; 829.58,381.89 836.61,374.86 C15.2@836.61,350.98 ; 866.14,823.82 866.54,823.43 866.54,779.92
  Bottom Layer w12: v1@57.47,764.38 v1(50.2,771.65) 50.2,774.56 83.39,807.75 83.39,859.4 115.16,891.17 115.16,919.29 206.69,1010.83 230.61,1010.83 235.88,1005.56 255.1,1005.56 v1(258.86,1001.81) ; VIB.2@69.18,374.16 69.18,253.01 63.35,247.19 CR1.1@59.34,247.19 49.29,247.19 43.46,241.36 43.46,231.31 17.37,205.22 17.37,47.59 33.92,31.04 213.34,31.04 252.17,69.87 252.17,139.96 302.43,190.23 v1(375.56,190.23) ; v1(244.09,754.52) 244.09,744.24 263.14,725.19 263.14,717.59 269.8,710.93 279.23,710.93 317.91,672.24 317.91,551.76 v1(324.4,545.28) ; v1@321.16,542.03 612.2,250.98 775.72,250.98 v1(778.54,253.8) ; v1(551.18,1014.18) 631.49,1014.18 v1(635.83,1009.84) 804.13,1009.84 v1(891.73,922.24) ; v1(1037.4,942.73) 986.86,942.73 969.94,959.65 929.68,959.65 892.28,922.24 v1(891.73,922.24) ; v1(1101.38,467.92) 1101.38,565.5 1120.08,584.21 v1(1120.08,592.12) ; v1@1117.13,591.54 1117.13,699.24 970.36,846.01 963.91,846.01 943.72,866.2 943.72,870.26 v1(891.73,922.24) ; v1(1442.91,858.27) 1442.91,864.72 1477.36,899.17 v1(1477.36,959.51)